# Altium PCB GH3020MB-V1.1 7.PcbDoc
Units mil, origin at the board's own origin, x right, y up, seen from the top; angles counter-clockwise.
Board outline 559.06 x 830.44 mil, 4 copper layers (Top, Inner Layer 2, Inner Layer 3, Bottom), stack 5.6 mil thick; 38 components, 35 nets, 143 pads, 139 vias.
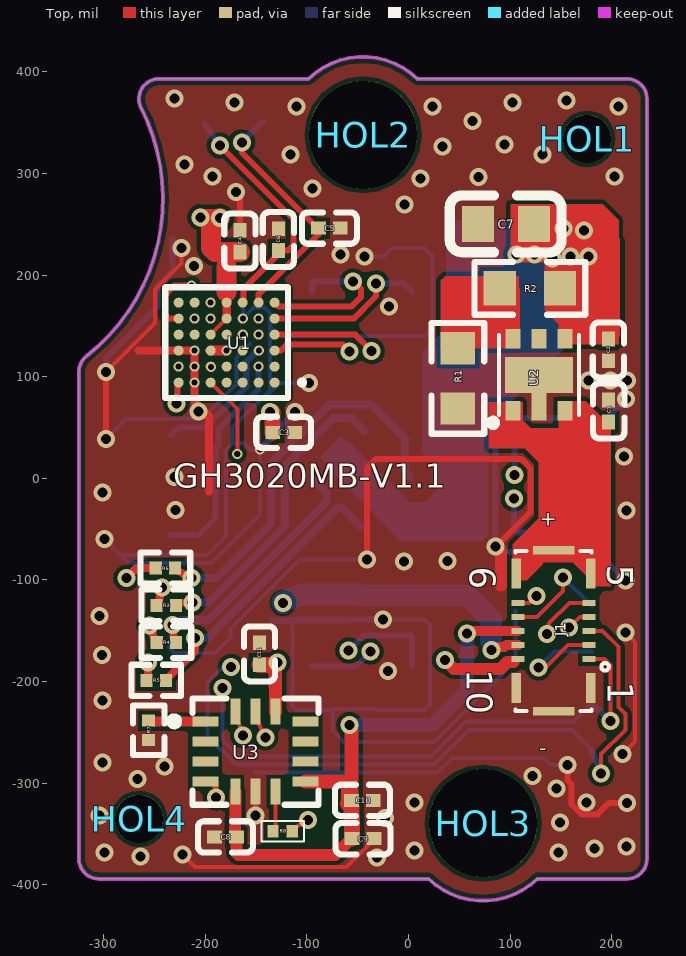
[diagram p0: Top view]
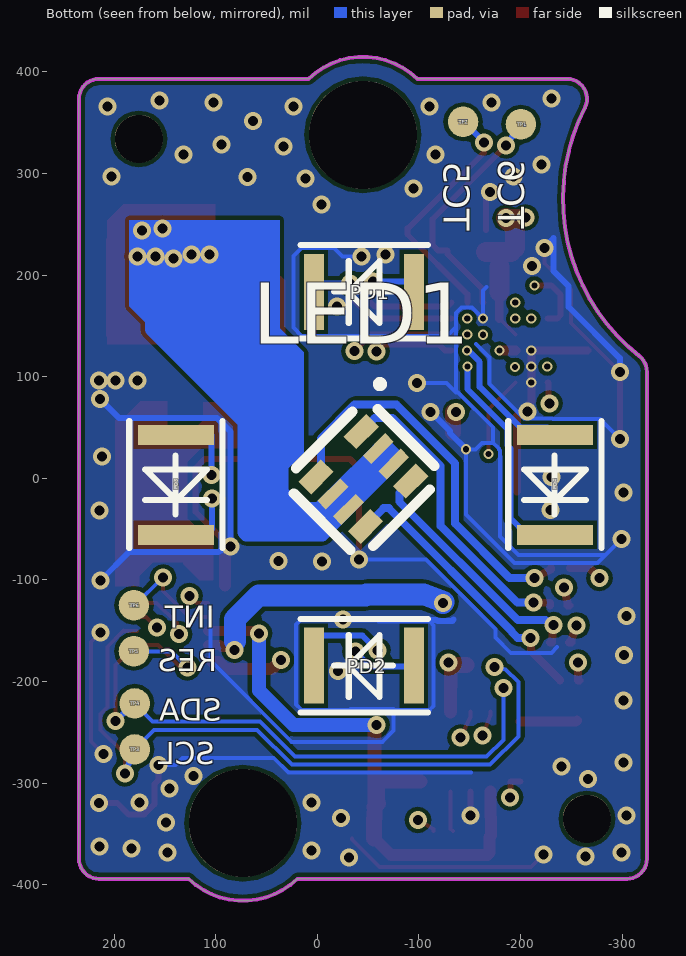
[diagram p1: Bottom view, seen from below]
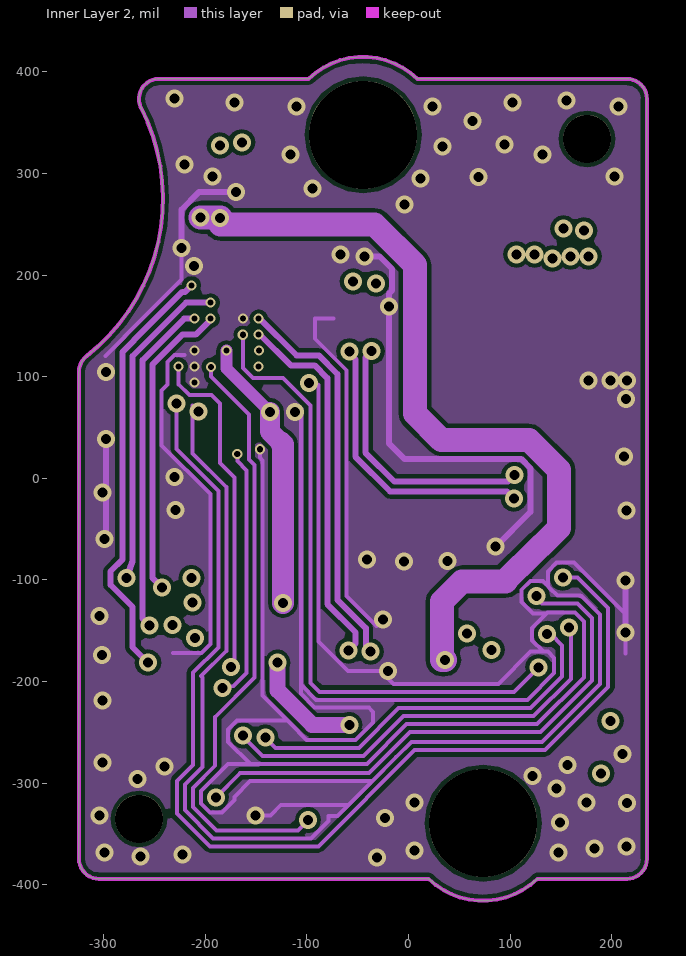
[diagram p2: Inner Layer 2]
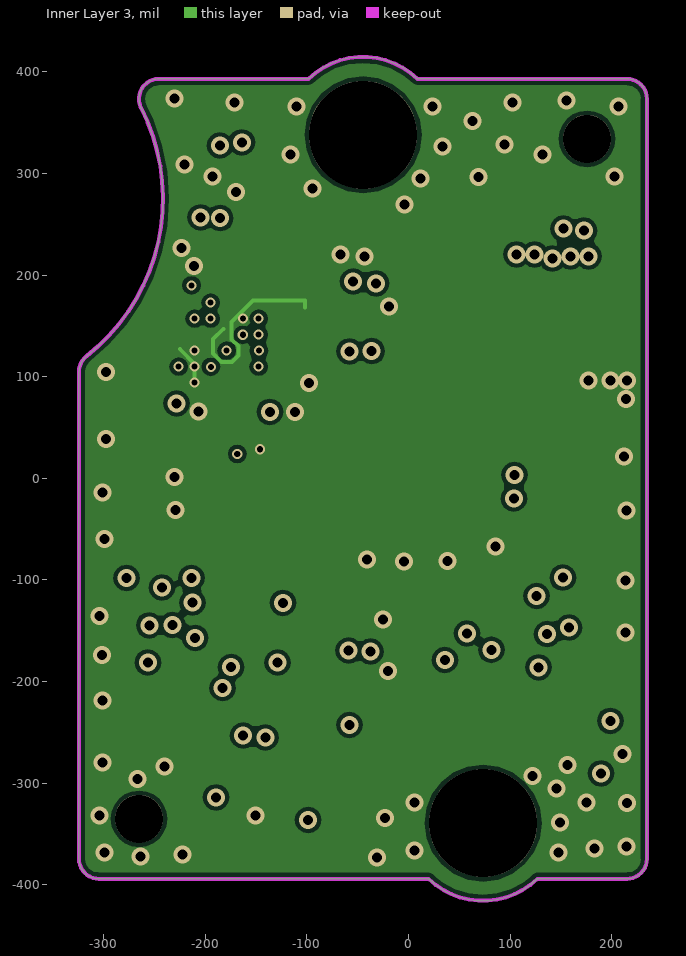
[diagram p3: Inner Layer 3]

## Layer stack, top to bottom
Solder Mask Top: solder mask 0.4, Solder Resist, Dk 3.5
Top: signal copper 1.4
Inner Layer 2: signal copper 1.4
Inner Layer 3: signal copper 1.4
Bottom: signal copper 1.4
Solder Mask Bottom: solder mask 0.4, Solder Resist, Dk 3.5

## Board outline
-324.39,104.84 -324.39,-374.56 ccw(c-304.7,-374.56) -304.7,-394.25 19.82,-394.26 ccw(c73.25,-339.13) 126.68,-394.26 214.98,-394.25 ccw(c214.98,-374.56) 234.67,-374.56 234.67,373.47 ccw(c214.98,373.47) 214.98,393.15 8.57,393.17 ccw(c-44.86,338.04) -98.29,393.17 -245.69,393.15 ccw(c-245.69,373.47) -263.23,364.53 -263.17,364.41 cw(c-438.56,275.04) -317.1,120.13 -316.88,120.31 ccw(c-304.7,104.84)

## Design rules (kind name [scope] priority, off if disabled: settings)
Clearance "Clearance - Default - DEFAULT- SMD" [IsVia vs IsSMTPin] p1: gap=0 ignorepadtopadclearanceinfootprint=FALSE
Clearance "Clearance - Default - DEFAULT - Via" [IsVia vs IsVia] p2: gap=0 ignorepadtopadclearanceinfootprint=FALSE
Clearance "Clearance - Default - DEFAULT - Net" [All] p3: gap=3.94 ignorepadtopadclearanceinfootprint=FALSE except(0: Arc-Hole Track-Hole SMDPad-Hole THPad-Hole Via-Hole Fill-Hole Poly-Hole Region-Hole Text-Hole; 10: Text-Text)
ComponentClearance "ComponentClearance - Default - DEFAULT" [All] p1: gap=0 collisioncheckmode=3 verticalgap=10 showdistances=FALSE
FanoutControl Fanout_Small [(CompPinCount < 5)] p3: bgadir=Out bgaviamode=Centered fanoutstyle=Auto fanoutdirection=OutThenIn viagrid=1 // Fanout_Small (Default Rule)
FanoutControl Fanout_SOIC [IsSOIC] p4: bgadir=Out bgaviamode=Centered fanoutstyle=Auto fanoutdirection=Alternating viagrid=1 // Fanout_SOIC (Default Rule)
HoleToHoleClearance "HoleToHoleClearance - Default - DEFAULT" [All] p1: gap=0 allowstackedmicrovias=TRUE
Length "Default Length" [All] p1: maxlimit=50000 minlimit=0
MaxMinImpedance "Default Impedance" [All] p1: minimum=50.00 maximum=150.0
ParallelSegment "Default Parallel Segment Same Layer" [All] p1: limit=1000 gap=200
ParallelSegment "Default Parallel Segment Adjasent" [All] p2: limit=1000 gap=200
PlaneConnect "Default PlaneConnect" [All] p1: planeconnectstyle=Direct reliefexpansion=20 reliefentries=4 reliefconductorwidth=3.94 reliefairgap=10
PolygonConnect "PolygonConnect - Default SMT" [IsSMTPin] p1: connectstyle=Direct reliefconductorwidth=3.94 reliefentries=4 polygonreliefangle="45 Angle" airgapwidth=10
PolygonConnect "PolygonConnect - Default Pad" [All] p2: connectstyle=Direct reliefconductorwidth=3.94 reliefentries=4 polygonreliefangle="45 Angle" airgapwidth=10
RoomDefinition "Room: DRW96205950" [All vs False] p1: confinementstyle=ConfineOut formatcopy=TRUE lockcomponents=FALSE outline -118.4,78.83 -239.48,78.83 -239.48,187.74 -118.4,187.74 -118.4,78.83
RoomDefinition "Room: DRW52040410" [All vs False] p2: confinementstyle=ConfineOut formatcopy=TRUE lockcomponents=FALSE outline -263.22,364.54 ccw(c-263.22,364.52) -263.22,364.5 ccw(c-263.22,364.52) -263.22,364.54
RoomDefinition "Room: DRW43974602" [All vs False] p3: confinementstyle=ConfineOut formatcopy=TRUE lockcomponents=FALSE outline -316.87,120.35 ccw(c-316.87,120.31) -316.87,120.27 ccw(c-316.87,120.31) -316.87,120.35
RoutingLayers "RoutingLayers - Default - DEFAULT" [All] p1: top layer_v5=TRUE mid layer 1_v5=TRUE mid layer 2_v5=TRUE bottom layer_v5=TRUE
RoutingPriority "RoutingPriority - Default - DEFAULT" [All] p1: routingpriority=0
RoutingTopology "Default Routing Topology" [All] p1: topology=Shortest
RoutingVias "RoutingVias - Default - DEFAULT" [All] p1: holewidth=37 width=55 viastyle="Through Hole" minholewidth=37 minwidth=55 maxholewidth=37 maxwidth=55
SMDToCorner "SMDToCorner - Default - DEFAULT" [All] p1: distance=0
SolderMaskExpansion [All] p1: expansion=4 istentingtop=FALSE
Width "Default Width" [All] p1: maxlimit=118.11 minlimit=3.94 preferedwidth=3.94
22 further rules are at their usual default settings.

## Classes and differential pairs
component class GH3020_PD_Board: C1 C2 C3 C4 C5 C6 C7 C8 C9 C10 C11 J1 LED1 PD1 PD2 PD3 PD4 R1 R2 R3 R4 R5 R6 R7 R8 TP1 TP2 TP3 TP4 TP5 TP6 U1 U2 U3

## Components (designator, comment, footprint, x,y, rotation, side; value= is the part's Value field where it differs from the comment)
C1 "C0201" C0201 197,66.29 r90 top
C2 "C0201" C0201 196.64,126.4 r270 top
C3 "C0201" C0201 -122.87,45.14 r0 top
C4 "C0201" C0201 -165.98,233.43 r90 top
C5 "C0201" C0201 -77.94,246.22 r0 top
C6 "C0201" C0201 -128.15,234.9 r90 top
C7 "C0603" C0603 95.82,250.23 r0 top
C8 "C0201" C0201 -180.24,-352.95 r180 top
C9 "C0201" C0201 -44.8,-354.74 r180 top
C10 "C0201" C0201 -45.44,-316.99 r0 top
C11 "C0201" C0201 -146.76,-172.8 r90 top
HOL1 "DH2_7MMNA" DH2_7MMNA 175.67,334.04 r0 top
HOL2 "DH2_7MMN" DH2_7MMN -44.82,338.04 r0 top
HOL3 "DH2_7MMN" DH2_7MMN 73.39,-339.32 r0 top
HOL4 "DH2_7MMNA" DH2_7MMNA -265.28,-335.17 r0 top
J1 "CONN-SMD_BK13C06-10DS-2-0.35V-800" CONN-SMD_BK13C06-10DS-2-0.35V-800 103.14,-230.64 r0 top
LED1 "SFH 7017" SFH7017 0,0 r135 bottom
PD1 "SFH2703" SFH2703 3.39,183.51 r180 bottom
PD2 "SFH2703" SFH2703 3.39,-184.51 r180 bottom
PD3 "SFH2703" SFH2703 139.22,-55.67 r90 bottom
PD4 "SFH2703" SFH2703 -233.81,-55.67 r90 bottom
R1 "0603R" 0603R 48.54,98.38 r270 top
R2 "0603R" 0603R 119.43,186.94 r180 top
R3 "RES0201" RES0201 -266.01,-108.4 r0 top
R4 "RES0201" RES0201 -265.84,-144.78 r0 top
R5 "RES0201" RES0201 -220.92,-215.5 r180 top
R6 "RES0201" RES0201 -211.84,-104.96 r180 top
R7 "RES0201" RES0201 -272.38,-275.5 r90 top
R8 "0201C-M" 0201C-M -123.9,-347.34 r0 top
TP1 "TESTPOINT" TESTPOINT -200.31,348.48 r180 bottom
TP2 "TESTPOINT" TESTPOINT -143.41,350.83 r180 bottom
TP3 "TESTPOINT" TESTPOINT 179.83,-266.9 r270 bottom
TP4 "TESTPOINT" TESTPOINT 179.83,-221.63 r270 bottom
TP5 "TESTPOINT" TESTPOINT 180.6,-170.31 r90 bottom
TP6 "TESTPOINT" TESTPOINT 180.6,-125.04 r90 bottom
U1 "WLCSP42" WLCSP42 -178.81,133.36 r180 top
U2 "U-DFN2020-6_L2.0-W2.0-P0.65-BL-EP" U-DFN2020-6_L2.0-W2.0-P0.65-BL-EP 128.39,101.81 r0 top
U3 "LGA-14_L3.0-W2.5-P0.50-TL_QMI8658A" LGA-14_L3.0-W2.5-P0.50-TL_QMI8658A -214.65,-214.36 r0 top

## Footprints (in the part's own frame and the unit in brackets; to place one, negate y for a bottom-side part, rotate by r counter-clockwise, add the part's x,y. Pads: shape width x height; smd on the part's side, far side on the other; paste and mask are expansions set on the pad)
0201C-M [mil]
  rect 11.02x12 smd: 1(-9.39,0) 2(9.39,0)
  silkscreen extent -21,-10 21,10
0603R [mil]
  rect 31.75x34.02 smd: 1(-29.65,0) 2(29.65,0)
  silkscreen extent -55,-26 55,26
C0201 [mil]
  rect 14.51x12.76 smd paste-6.75 mask+2: 1(-10.8,0) 2(10.8,0)
  silkscreen extent -27,-15 27,15
C0603 [mm]
  rect 0.8x0.9 smd: 1(-0.7,0) 2(0.7,0)
  silkscreen extent -1.41,-0.71 1.39,0.72
CONN-SMD_BK13C06-10DS-2-0.35V-800 [mm]
  rect 0.325x0.15 smd mask+0.051: 1(1.89,1.344) 2(1.89,1.694) 3(1.89,2.044) 4(1.89,2.394) 5(1.89,2.744) 6(0.116,2.744) 7(0.116,2.394) 8(0.116,2.044) 9(0.116,1.694) 10(0.116,1.344)
  rect 0.24x0.75 smd mask+0.051: 11(0.074,0.609) 12(1.933,0.609) 13(1.933,3.479) 14(0.074,3.479)
  rect 1.04x0.215 smd mask+0.051: 15(1.007,0.029) 16(1.007,4.059)
  silkscreen extent 0.05,0.04 2.39,4.04
DH2_7MMN [mm]
  round 2.7 hole 2.7 unplated: 1(0,0)
DH2_7MMNA [mm]
  round 1.2 hole 1.2 unplated: 1(0,0)
LGA-14_L3.0-W2.5-P0.50-TL_QMI8658A [mm]
  rect 0.65x0.25 smd mask+0.051: 1(0.374,-0.642) 2(0.374,-1.142) 3(0.374,-1.642) 4(0.374,-2.142) 8(2.874,-2.142) 9(2.874,-1.642) 10(2.874,-1.142) 11(2.874,-0.642)
  rect 0.25x0.65 smd mask+0.051: 5(1.124,-2.392) 6(1.624,-2.392) 7(2.124,-2.392) 12(2.124,-0.392) 13(1.624,-0.392) 14(1.124,-0.392)
  silkscreen extent -0.51,-2.72 3.2,-0.07
RES0201 [mil]
  rect 11.93x12.76 smd paste-5.88 mask+2: 1(17.97,-16.62) 2(36.99,-16.62)
  silkscreen extent 3,-32 52,-1
SFH2703 [mm]
  rect 0.5x1.9 smd mask+0.051: 1(2.5,0) 2(0,0)
  silkscreen extent -0.33,-1.17 2.84,1.17
SFH7017 [mm]
  rect 0.8x0.45 smd paste+0 mask+0.051: 1(1.6,0.05) 4(1.6,-1.7) 5(0,0.05) 8(0,-1.7)
  rect 0.8x0.3 smd paste+0 mask+0.051: 2(1.6,-0.55) 3(1.6,-1.1) 6(0,-0.55) 7(0,-1.1)
  silkscreen extent -0.69,-2.18 2.82,0.61, body extent -0.25,-1.88 1.85,0.25, height 0.61
TESTPOINT [mil]
  round 30 smd: 1(0,0)
U-DFN2020-6_L2.0-W2.0-P0.65-BL-EP [mm]
  rect 0.37x0.48 smd paste-0.227 mask+0.051: 1(-0.65,-0.9) 3(0.65,-0.9) 4(0.65,0.9) 5(0,0.9) 6(-0.649,0.9)
  rect 0.37x0.8 smd paste-0.387 mask+0.051: 2(0,-0.74)
  rect 1.7x0.9 smd paste-0.837 mask+0.051: 7(0,0.001)
  silkscreen extent -1.24,-1.29 1,1
WLCSP42 [mm]
  round 0.25 smd paste-0.112 mask+0.022: A1(-1.194,0.995) A2(-0.794,0.995) A3(-0.394,0.995) A4(0.006,0.995) A5(0.406,0.995) A6(0.806,0.995) A7(1.206,0.995) B1(-1.194,0.595) B2(-0.794,0.595) B3(-0.394,0.595) B4(0.006,0.595) B5(0.406,0.595) B6(0.806,0.595) B7(1.206,0.595) C1(-1.194,0.195) C2(-0.794,0.195) C3(-0.394,0.195) C4(0.006,0.195) C5(0.406,0.195) C6(0.806,0.195) C7(1.206,0.195) D1(-1.194,-0.205) D2(-0.794,-0.205) D3(-0.394,-0.205) D4(0.006,-0.205) D5(0.406,-0.205) D6(0.806,-0.205) D7(1.206,-0.205) E1(-1.194,-0.605) E2(-0.794,-0.605) E3(-0.394,-0.605) E4(0.006,-0.605) E5(0.406,-0.605) E6(0.806,-0.605) E7(1.206,-0.605) F1(-1.194,-1.005) F2(-0.794,-1.005) F3(-0.394,-1.005) F4(0.006,-1.005) F5(0.406,-1.005) F6(0.806,-1.005) F7(1.206,-1.005)
  silkscreen extent -1.93,-1.39 1.54,1.38

## Part data
C1 C2 C3 C4 C5 C6: library part 1uF, "GRM033R61A105ME44D / 精度: ±20% / 额定电压: 10V / 材质(温度系数): X5R"
C7: "HGC0603R5106M250NTHJ / 品牌: Chinocera(华瓷) / 封装: 0603 / 容值: 10uF / 精度: ±20% / 额定电压: 25V / 材质(温度系数): X5R"
C8: library part 1uF, "0201B103K250NT / 精度: ±10% / 额定电压: 25V / 材质(温度系数): X7R"
C9 C11: library part 1uF, "CL03A104KO3NNNC / 精度: ±10% / 额定电压: 16V / 材质(温度系数): X5R"
C10: library part 1uF, "GRM033R61A225KE47D / 精度: ±10% / 额定电压: 10V / 材质(温度系数): X5R"
J1: library part 10pin_ds_BK13C06-10DS/2-0.35V(800)
PD1 PD2 PD3 PD4: library part SFH2073
R1: library part 200kΩ, "SCR0603F40K / 精度: ±1% / 功率: 100mW"
R2: library part 200kΩ, "0603WAF2103T5E / 精度: ±1% / 功率: 100mW"
R3 R4 R5 R6: "0201WMF0000TEE / 精度: ±1% / 功率: 50mW"
R7: "0201WMF1002TEE / 精度: ±1% / 功率: 50mW"
R8: library part 0Ω, "0201WMF0000TEE / 精度: ±1% / 功率: 50mW"
TP1 TP2 TP3 TP4 TP5 TP6: library part TP
U1: library part GH3020
U2: library part AP7335-18SNG-7, "AP7335-SNG-7 / 品牌: DIODES(美台) / 封装: DFN2020-6 / 输出类型: 可调 / 最大输入电压: 6V / 输出电压: 800mV~5V / 输出电流: 300mA"
U3: library part ICM-42670-P

## Via types
v1: diameter 17.72, hole 9.84, Top to Bottom, 121 vias
v2: diameter 10, hole 6, Top to Bottom, 18 vias

## Nets (pads, with @x,y where several pads share a name; then routed paths per layer and width w, separated by ;. In a path a pad name is that pad's centre, name@x,y a point inside that pad or via, vN(x,y) a via of type N, cw(c..) or ccw(c..) an arc to the next point about the centre after c; other vN are vias at no path point)
GH3020_INT: J1.7 TP6.1 U1.A7 | length 1205.7
  Top w3.94: J1.7 126.36,-136.37 151.82,-110.92 v1(151.82,-97.81)
  Top w5.91: v1(-228.32,73.69) -227.3,73.69 -227.3,94.16 U1.A7
  Inner Layer 2 w3.94: v1(-228.32,73.69) -228.32,28.74 -187.26,-12.32 -187.26,-166.45 -212.16,-191.35 -212.16,-281.98 -227.91,-297.73 -227.91,-329.9 -195.6,-362.21 -88.62,-362.21 5.95,-267.64 134.35,-267.64 196.33,-205.66 196.33,-127.7 166.44,-97.81 v1(151.82,-97.81)
  Bottom w3.94: v1(151.82,-97.81) 152.21,-97.42 180.21,-125.43 TP6.1
GH3020_RES: J1.2 TP5.1 U1.D3 | length 743.7
  Top w3.94: v1(127.99,-186.08) 134.76,-186.08 156.91,-163.93 J1.2
  Inner Layer 2 w3.94: v2(-163.13,141.26) -163.13,108.68 -153.13,98.68 -123.67,98.68 -96.67,71.68 -96.67,-201.33 -87.71,-210.29 103.78,-210.29 v1(127.99,-186.08)
  Bottom w3.94: v1(127.99,-186.08) 143.76,-170.31 TP5.1
GND: C1.2 C2.2 C3.2 C4.2 C5.2 C6.2 C7.1 C8.2 C9.1 C10.2 C11.2 J1.11 J1.12 J1.15 R1.2 R7.1 U1.A6 U1.B6 U1.C6 U1.C7 U1.E3 U2.2 U2.7 U3.6 | length 10105.5
  Top w3.94: v1(-297.75,104.49) -249.42,152.82 -249.42,185.74 -223.52,211.64 v1(-223.52,226.56) ; v1(-222.44,-370.08) -210.08,-382.44 -61.3,-382.44 -34.24,-355.38 -34.01,-355.38 C9.1 ; v1(210.68,-271.37) 222.85,-259.2 222.85,-161.27 v1(213.5,-151.92)
  Top w5.91: v1(-297.75,38.83) v1(-297.75,104.49) ; v1(-169.83,281.67) -165.98,277.82 C4.2 ; v1(-150.64,-331.68) U3.6 ; v1(-40.96,-79.84) -40.96,10.01 -31.89,19.08 110.76,19.08 119.99,9.85 119.99,-33.04 v1(85.73,-67.3) v1@90.83,-73.21 ; v1(156.46,-282.19) 156.46,-297.16 160.43,-301.13 160.43,-320.83 170.31,-330.71 185.98,-330.71 197.19,-319.5 v1(214.9,-319.5)
  Top w7.87: -265.83,125.66 U1.C7 v2(-210.52,125.66) v2(-210.52,109.91) v2(-210.52,94.16) -210.52,75.37 v1@-205.97,70.82 ; v1(-206.84,65.82) -206.84,69.95 v1@-205.97,70.82 ; -196.41,-13.19 -196.41,61.26 v1@-205.97,70.82
  Top w11.81: 90.83,-105.35 v1@90.83,-73.21
  Inner Layer 2 w3.94: -298.05,120.46 -279.53,138.98 -279.53,139.56 -223.52,195.57 v1(-223.52,226.56) ; -232.02,-171.85 -203.85,-171.85 -195.14,-163.14 -195.14,-15.64 -243.08,32.3 -243.08,86.27 -237.18,92.18 -237.18,114.43 -230.21,121.39 -220.63,121.39 ; v1(-206.84,65.82) -212.57,71.64 -212.57,24.39 -179.36,-8.82 -179.36,-169.76 -204.28,-194.68 -203.03,-195.93 -203.03,-284.36 -220.03,-301.36 -220.03,-326.64 -192.34,-354.33 -95.98,-354.33 -78.88,-337.23 -78.88,-332.24 -69.79,-332.24 -58.98,-321.43 ; v1(-150.64,-331.68) v1(-150.64,-331.68) -136.11,-331.76 -125.78,-321.43 -58.98,-321.43 ; v2(-146.33,28.55) -146.33,20.24 -143.71,17.62 -143.71,-214 -119.25,-238.47 ; v1(-111.52,65.47) -106.08,60.03 -106.08,-199.93 -106.08,-203.06 ; v1(-97.88,93.88) -91.05,93.88 -88.77,91.6 -88.77,-160.62 -59.52,-189.87 v1(-20.21,-189.87) -20.21,-197.07 -14.87,-202.41 88.47,-202.41 120.22,-170.66 132.68,-170.66 ; -74.1,157.32 -92.32,157.32 -92.32,137.47 -61.18,106.33 -61.18,-115.9 -31.6,-145.49 v1(-24.98,-138.87) ; v1@206.61,-271.37 v1(210.68,-271.37) ; 213.5,-172.23 v1(213.5,-151.92) ; 213.5,-133.73 162.81,-83.04 145.71,-83.04 137.06,-91.69 137.06,-105.98 ; -155.71,-281.13 -40.98,-281.13 -1.91,-242.06 126.52,-242.06 172.7,-195.88 172.7,-140.82 164.05,-132.17 136.76,-132.17 135.7,-133.23 ; -155.71,-281.13 -177.53,-281.13 -204.28,-307.88 -204.28,-320.12 -195.63,-328.77 -183.41,-328.77 -171.52,-316.88 -171.52,-313.53 -156.01,-298.02 -35.57,-298.02 ; -155.71,-281.13 -177.48,-259.36 -177.48,-247.12 -168.83,-238.47 -119.25,-238.47 ; -119.25,-238.47 -116.24,-241.48 -100.23,-257.49 -52.12,-257.49 -35.01,-240.38 -35.01,-229.81 -39.17,-225.65 -92.43,-225.65 -106.08,-212 -106.08,-203.06 ; -106.08,-203.06 -90.97,-218.17 116.86,-218.17 143.37,-191.66 143.37,-176.83 137.2,-170.66 132.68,-170.66 ; -58.98,-321.43 -54.22,-316.67 -35.57,-298.02 ; -35.57,-298.02 -12.11,-274.56 2.89,-259.56 131.29,-259.56 188.45,-202.4 188.45,-134.3 170.22,-116.07 169.34,-116.07 168.76,-115.49 146.57,-115.49 139.36,-108.28 137.06,-105.98 ; 132.68,-170.66 121.61,-159.59 121.61,-147.32 135.7,-133.23 ; 135.7,-133.23 122.55,-133.23 111.27,-121.95 111.27,-109.71 119.92,-101.06 132.14,-101.06 137.06,-105.98
  Inner Layer 2 w5.91: v1(-299.3,-59.71) -297.75,-58.16 v1(-297.75,38.83) ; v1(-223.52,226.56) -223.52,264.47 -206.32,281.67 v1(-169.83,281.67) ; v1(-43.31,218.5) -28.56,218.5 -16.25,206.2 -16.25,184.63 -19.37,181.51 v1(-19.37,168.91) -19.37,34.39 -4.06,19.08 110.76,19.08 119.99,9.85 119.99,-33.04 v1(85.73,-67.3) ; v1(213.5,-151.92) 213.5,-133.73 v1(213.5,-100.63)
  Inner Layer 3 w3.94: -225.19,127.36 -210.52,112.7 v2(-210.52,109.91) v2(-210.52,94.16) ; -182.22,147.17 -192.34,137.05 -192.34,122.87 -184.02,114.55 -173.82,114.55 -167.42,120.94 -167.42,130.05 -174.04,136.67 -174.04,153.86 -153.03,174.87 -101.92,174.87 -101.92,167.89
  Bottom w3.94: v1(-299.3,-59.71) -283.73,-75.28 ; v1(-297.75,38.83) -278.07,58.51 -231.88,58.51 -231.47,58.92 v1@-203.24,58.92 ; -235.87,-166.27 -230.29,-171.85 -190.31,-171.85 -175.19,-156.72 -175.19,-148.21 -106.82,-79.84 v1(-40.96,-79.84) ; v1(-206.84,65.82) v1@-203.24,58.92 ; -166.28,188.21 -163.09,185.02 v2(-163.09,157.34) -152.36,168.07 -141.98,168.07 -136.4,162.49 -136.4,148.85 ; -156.07,132.16 -169.35,118.88 -169.35,92.81 v1@-203.24,58.92 ; -151.08,-289.72 28.56,-289.72 43.21,-275.07 132.66,-275.07 139.78,-282.19 v1(156.46,-282.19) ; -110.59,-139.2 -110.59,-141.2 ; v1(-97.88,93.88) -127.17,93.88 -136.4,84.64 ; -60.1,-139.2 -60.1,-141.2 -110.59,-141.2 ; v1(-43.31,218.5) -24.85,218.5 -16.53,226.82 15.67,226.82 23.69,218.8 23.69,148.21 15.68,140.2 -127.75,140.2 -136.4,148.85 ; v1(-24.98,-138.87) 15.9,-138.87 21.01,-143.98 21.01,-222.49 15.67,-227.83 -31.51,-227.83 -32.37,-226.97 -74.96,-226.97 ; 105.34,-130.24 105.34,-179.43 25.44,-259.33 -63.89,-259.33 -74.96,-248.26 -74.96,-226.97 ; -283.73,-75.28 -197.83,-75.28 -179.69,-57.14 -179.69,27.2 -178.67,28.22 -178.67,29.24 -173.07,34.84 ; -283.73,-75.28 -275.78,-83.23 -193.97,-83.23 -146.33,-35.59 v2(-146.33,28.55) -155.53,28.55 -161.82,34.84 -173.07,34.84 ; -173.07,34.84 -173.07,49.87 -138.29,84.64 -136.4,84.64 ; -136.4,84.64 -136.4,148.85 ; -110.59,-141.2 -114.06,-144.67 -114.06,-224.36 -110.59,-227.83 -75.82,-227.83 -74.96,-226.97
  Bottom w5.91: v1(-297.75,104.49) -297.75,118.17 -247.29,168.63 -247.29,189.08 -232.52,203.84 -232.52,236.32 -223.52,227.31 v1(-223.52,226.56) ; v2(-146.33,28.55) -130.29,44.59 -130.29,46.7 v1(-111.52,65.47) ; -133.93,-139.2 -132.8,-140.33 -118.1,-140.33 -117.09,-139.32 -110.71,-139.32 -110.59,-139.2 -60.1,-139.2 v1(-24.98,-138.87) ; v1(85.73,-67.3) 97.33,-72.4 185.27,-72.4 v1(213.5,-100.63) ; v1(85.73,-67.3) 85.76,-55.49 85.75,46.28 98.97,59.5 195.34,59.5 v1(213.81,77.97)
  other v1: -31.09,-373.47 -263.64,-372.38 -299.21,-368.11 147.64,-368.11 5.91,-366.14 183.07,-364.17 214.57,-362.2 149.08,-338.83 -23.05,-334.55 -303.99,-331.91 5.91,-318.9 175.2,-318.9 145.67,-305.12 -266.55,-295.84 122.15,-293.12 -240.16,-283.46 -301.18,-279.53 -301.18,-218.5 -301.69,-173.95 -304.18,-135.51 -4.51,-81.92 38.33,-81.59 -229.2,-31.28 214.57,-31.5 -301.18,-13.78 -230.2,1.06 211.82,21.65 177.17,96.46 198.82,96.46 215.09,96.1 -211.26,208.71 -66.93,220.47 -3.94,269.69 -94.49,285.43 11.81,295.28 68.97,296.61 -192.91,297.24 202.76,297.24 -220.47,309.06 -116.14,318.9 131.89,318.9 33.46,326.77 94.49,328.74 63.15,351.73 -110.24,366.14 23.62,366.14 206.69,366.14 -171.26,370.08 102.36,370.08 155.51,372.05 -230.31,374.02
GREEN1_LED: R3.1 U1.E5 | length 320.9
  Top w7.87: R3.1 -246.01,-125.02 -246.01,-122.58 v1(-242.7,-107.52)
  Inner Layer 2 w3.94: v2(-194.77,157.16) v2@-194.4,157.55
  Inner Layer 2 w5.91: v1(-242.7,-107.52) -251.94,-98.28 -251.94,112.19 -222.73,141.4 -209.46,141.4 -194.24,156.62 v2(-194.77,157.16) ; v2@-194.45,157.6 v2@-194.4,157.55
GREEN2_LED: R5.2 U1.E7 | length 504.2
  Top w5.91: U1.E7 -235.91,157.16 -239.5,160.75 -239.5,180.7 -230.35,189.84 v2(-213.61,189.84)
  Top w7.87: R5.2 -256.58,-198.87 v1(-256.58,-181.34)
  Inner Layer 2 w5.91: v1(-256.58,-181.34) -271.71,-166.21 -271.71,-126.56 -293.31,-104.96 -293.31,-91.63 -281.48,-79.8 -281.48,124.41 -270.45,135.44 -270.45,135.72 -222.68,183.49 -219.96,183.49 v2(-213.61,189.84)
I2C1_SCL: J1.5 U3.13 | length 461.5
  Top w3.94: U3.13 -150.71,-234.27 v1(-140.98,-255.16) ; v1(136.37,-153.44) 138.38,-142.61 158.4,-122.59 J1.5
  Inner Layer 2 w3.94: v1(-140.98,-255.16) -130.77,-265.37 -48.87,-265.37 -9.8,-226.3 119.87,-226.3 151.24,-194.92 151.24,-164.47 140.21,-153.44 v1(136.37,-153.44)
I2C1_SDA: J1.4 U3.14 | length 463.4
  Top w3.94: U3.14 -170.39,-232.7 v1(-162.72,-253.24) ; v1(157.94,-146.94) 168.51,-136.37 J1.4
  Inner Layer 2 w3.94: v1(-162.72,-253.24) -163.25,-253.77 -143.78,-273.25 -44.24,-273.25 -5.17,-234.18 123.12,-234.18 159.72,-197.58 159.72,-148.72 v1(157.94,-146.94)
I2C3_SCL: J1.3 TP3.1 U1.B7 | length 1024.7
  Top w3.94: J1.3 190.42,-150.15 190.63,-149.95 206.5,-165.82 206.5,-224.99 213.43,-231.92 213.43,-247.59 189.48,-271.54 v1(189.48,-290.4)
  Inner Layer 2 w3.94: v2(-226.27,109.91) -226.27,92.54 -215.65,81.92 -193.91,81.92 -185.77,73.78 -185.77,14.83 -171.49,0.55 -171.49,-183.86 -173.45,-185.82 v1(-174.54,-185.82)
  Bottom w3.94: v1(-174.54,-185.82) -185.37,-188.05 -197.73,-200.41 -197.73,-254.07 -169.96,-281.84 25.2,-281.84 59.29,-247.75 160.67,-247.75 TP3.1
  Bottom w5.91: TP3.1 v1(189.48,-290.4)
I2C3_SDA: J1.1 TP4.1 U1.A5 | length 875.8
  Top w3.94: U1.A5 -168.56,67.95 v2(-168.56,23.93) ; J1.1 192.78,-177.71 198.63,-183.56 v1(198.63,-238.71)
  Inner Layer 2 w3.94: v1(-182.97,-206.53) -172.14,-204.3 -159.46,-191.62 -159.46,7.76 -168.56,16.86 v2(-168.56,23.93)
  Bottom w3.94: v1(-182.97,-206.53) -182.97,-257.64 -166.65,-273.96 21.95,-273.96 56.63,-239.28 162.18,-239.28 TP4.1
  Bottom w5.91: TP4.1 v1(198.63,-238.71)
ICM_INT1: J1.6 U3.4 | length 590.2
  Top w3.94: J1.6 118.69,-122.59 119.71,-122.15 v1(126.03,-115.83)
  Top w5.91: U3.4 -190.16,-298.68 v1(-189.52,-314)
  Inner Layer 2 w3.94: v1(-189.52,-314) -165.66,-290.14 -38.85,-290.14 1.35,-249.93 129.78,-249.94 180.58,-199.14 180.58,-137.56 166.38,-123.37 131.34,-123.37 126.03,-118.06 v1(126.03,-115.83)
IR_LED: R4.1 U1.E6 | length 351.6
  Top w7.87: v1(-255.21,-144.7) -249.9,-158.96 -249.9,-161.4 R4.1
  Inner Layer 2 w5.91: v1(-255.21,-144.7) -261.8,-138.11 -261.8,116.25 -220.89,157.16 v2(-210.52,157.16)
NETC5_1: C5.1 TP2.1 U1.F2 | length 242.7
  Top w5.91: v1(-164.09,330.7) -164.09,320.71 -89.61,246.22 C5.1 -88.73,239.96 -147.53,181.16 U1.F2
  Bottom w5.91: v1(-164.09,330.7) TP2.1
NETC6_1: C6.1 TP1.1 U1.F3 | length 236.9
  Top w5.91: v1(-185.69,327.52) -113.36,255.19 -113.36,229.56 -118.82,224.1 C6.1 -128.15,220.61 -162.29,186.47 -162.29,172.9 U1.F3
  Bottom w5.91: TP1.1 v1(-185.69,327.52)
NETLED1_1: LED1.1 R3.2 | length 303.8
  Top w7.87: R3.2 -229.02,-122.61 v1(-212.68,-122.37)
  Bottom w7.87: v1(-212.68,-122.37) -196.75,-122.37 -121.38,-47 -121.38,12.07 -74.03,59.42 -56.4,59.42 LED1.1
NETLED1_4: LED1.4 R4.2 | length 245.6
  Top w7.87: v1(-232.46,-144.55) -230.88,-158.96 -230.88,-161.4 R4.2
  Bottom w7.87: v1(-232.46,-144.55) -224.47,-139.62 -197.22,-139.62 -80.66,-23.06 -80.66,-14.49 -92.12,-3.02 LED1.4
NETLED1_5: LED1.5 R6.1 | length 388.8
  Top w7.87: R6.1 -229.81,-89.72 v1(-213.79,-98.11)
  Bottom w7.87: v1(-213.79,-98.11) -189.22,-98.11 -135.59,-44.48 -135.59,14.56 -77.63,72.52 -36.64,72.52 -3.48,39.36 -3.48,6.26 LED1.5
NETLED1_8: LED1.8 R5.1 | length 277
  Top w7.87: R5.1 -238.89,-198.46 -210.31,-169.88 v1(-209.96,-157.08)
  Bottom w7.87: v1(-209.96,-157.08) -197.16,-157.08 -191.1,-151.02 -191.1,-150.2 -70.32,-29.42 -65.23,-29.42 LED1.8
NETR1_1: R1.1 R2.2 U2.6 | length 307.8
  Top w3.94: R1.1 33.46,128.03 33.46,193.96 35.14,195.64 R2.2@94.96,195.64 ; R1.1 R1.1@51.44,137.25 ; R1.1 48.54,134.35 R1.1@51.44,137.25 ; R1.1@51.44,137.25 U2.6 107.12,137.25 107.96,138.09 107.96,186.59 R2.2 ; R2.2 R2.2@94.96,195.64 ; R2.2 89.77,190.45 R2.2@94.96,195.64
NETR7_2: R7.2 U3.1 | length 56.3
  Top w9.84: R7.2 -254.65,-239.62 U3.1
NETR8_1: R8.1 U3.7 | length 39.8
  Top w3.94: R8.1 -131.02,-345.07 U3.7
PD0_ANODE: PD1.1 U1.F1 | length 159.3
  Top w5.91: U1.F1 -127.73,168.85 -56.32,168.85 -46.68,178.49 -46.68,185.87 v1(-54.52,193.71)
  Bottom w5.91: PD1.1 -95.04,192.65 -93.98,193.71 v1(-54.52,193.71)
PD0_CATHODE: PD1.2 U1.E1 | length 160.5
  Top w5.91: U1.E1 -54.09,157.16 -32,179.25 v1(-32,191.94)
  Bottom w5.91: v1(-32,191.94) -5.04,191.94 PD1.2
PD1_ANODE: PD2.1 U1.E2 | length 451.3
  Inner Layer 2 w5.91: v2(-147.53,157.16) -146.99,157.69 -110.26,120.96 -88.34,120.96 -70.04,102.66 -70.04,-119.61 -42.1,-147.55 -42.1,-165.86 v1(-37.39,-170.57)
  Bottom w5.91: PD2.1 -94.32,-185.23 -52.05,-185.23 v1(-37.39,-170.57)
PD1_CATHODE: PD2.2 U1.D2 | length 466.1
  Inner Layer 2 w5.91: v2(-147.53,141.41) -146.89,142.05 -115.94,111.11 -92.41,111.12 -79.89,98.59 -79.89,-123.91 -51.98,-151.82 -51.98,-162.43 v1(-59.03,-169.48)
  Bottom w5.91: v1(-59.03,-169.48) -44.37,-154.82 2.5,-154.82 3.39,-155.71 PD2.2
PD2_ANODE: PD3.1 U1.D1 | length 440.6
  Top w5.91: U1.D1 -52.27,141.41 -36.12,125.25 v1(-36.29,125.08)
  Inner Layer 2 w5.91: v1(-36.29,125.08) -42.48,118.89 -42.48,25.3 -13.97,-3.21 97.7,-3.21 v1(104.24,3.33)
  Bottom w5.91: v1(104.24,3.33) 104.24,42.76 PD3.1
PD2_CATHODE: PD3.2 U1.C1 | length 457.2
  Top w5.91: U1.C1 -125.82,125.66 -120.01,131.47 -64.61,131.47 v1(-58.1,124.96)
  Inner Layer 2 w5.91: v1(-58.1,124.96) -52.32,116.77 -52.32,21.22 -18.04,-13.06 96.79,-13.06 v1(103.65,-19.92)
  Bottom w5.91: v1(103.65,-19.92) 103.65,-49.85 PD3.2@107.32,-53.52 ; PD3.2@107.32,-53.52 PD3.2 137.07,-53.52 PD3.2@107.32,-53.52
PD3_ANODE: PD4.1 U1.C2 | length 135.9
  Bottom w5.91: PD4.1 -226.51,50.06 -199.57,50.06 -159.72,89.91 -159.72,114.62 -147.99,126.34 v2(-147.31,125.66)
PD3_CATHODE: PD4.2 U1.B2 | length 217.4
  Bottom w5.91: PD4.2 -206.23,-55.67 -190.05,-39.49 -190.05,29.25 -186.98,32.32 -186.98,48.52 -147.6,87.9 v2(-147.6,109.91)
RED_LED: R6.2 U1.F5 | length 352.1
  Top w7.87: v1(-277.56,-98.15) -267.75,-88.34 R6.2
  Inner Layer 2 w5.91: v1@-278.24,-97.24 -277.56,-97.93 v1(-277.56,-98.15) -271.64,-81.65 -271.64,120.33 -219.06,172.9 v2(-194.77,172.9)
SW1_VDD1V8: C3.1 J1.9 U1.C4 U1.C5 | length 586.4
  Top w3.94: v2(-179.08,125.61) U1.C4 v2(-179.08,125.61)
  Top w9.84: U1.C5 U1.C4 ; v1(81.44,-168.77) 84.12,-166.09 94.24,-166.09 96.39,-163.93 J1.9
  Top w15.75: v1(-136.52,65.37) -133.67,65.37 C3.1
  Inner Layer 2 w11.81: v2(-179.08,125.61) -179.08,107.93 v1(-136.52,65.37)
  Inner Layer 2 w19.68: v1(-136.52,65.37) -136.52,45.98 -125.59,35.05
  Inner Layer 2 w21.65: -125.59,35.05 -123.7,33.16 v1(-123.7,-122.61)
  Bottom w3.94: v1@81.26,-160.18 81.44,-160.36 v1(81.44,-168.77)
  Bottom w21.65: v1(-123.7,-122.61) -124.08,-121.6 -104.38,-114.23 -48.54,-114.23 -47.53,-115.24 57.7,-115.24 81.26,-138.79 v1@81.26,-160.18
SW2_VDD1V9: C8.1 C9.2 C10.1 C11.1 J1.8 U3.5 U3.8 U3.12 | length 778.1
  Top w9.84: v1(57.46,-152.65) 59.96,-150.15 95.4,-150.15 J1.8
  Top w11.81: U3.5 -170.39,-333.47 -170.78,-333.86 -170.78,-351.62 C8.1 -169.45,-368.49 -167.31,-370.63 -72.36,-370.63 -56.47,-354.74 C9.2
  Top w12.99: v1@-131.19,-183.6 U3.12
  Top w13.78: U3.8 -59.56,-298.68 C10.1@-59.56,-320.13 ; v1(-58.23,-242.72) -56.24,-244.71 C10.1 -55.96,-316.99 -55.96,-323.73 -55.96,-329.17
  Top w15.75: C11.1 -131.19,-183.6 -128.99,-181.39 v1(-128.87,-181.39) ; C10.1@-59.56,-320.13 -55.96,-323.73 ; -55.96,-329.17 -55.96,-334.65 -55.6,-335.01 C9.2
  Inner Layer 2 w15.75: v1(-128.87,-181.39) -128.87,-208.7 -94.85,-242.72 v1(-58.23,-242.72)
  Bottom w13.78: v1(-58.23,-242.72) 23.72,-242.72 57.46,-208.98 v1(57.46,-152.65)
SYNC: R8.2 U1.B5 | length 623.4
  Top w3.94: U1.B5 v2(-194.51,109.61) ; R8.2 -114.5,-345.36 v1(-98.83,-336.3)
  Inner Layer 2 w3.94: v2(-194.51,109.61) -194.51,100.15 -157.24,62.88 -157.24,18.67 -151.59,13.02 -151.59,-196.08 -190.26,-234.75 -190.26,-282.73 -212.16,-304.62 -212.16,-323.38 -189.08,-346.45 -108.98,-346.45 v1(-98.83,-336.3)
VCC_3V3: C4.1 J1.10 U1.D5 U1.E4 U1.F4 | length 1107.3
  Top w3.94: U1.D5 U1.E4
  Top w5.91: -179.03,207.95 C4.1@-165.98,220.75 ; -179.03,208.13 -165.98,221.75 C4.1@-165.98,220.75 ; C4.1 C4.1@-165.98,220.75 ; 103.41,-180.86 J1.10 ; 103.41,-180.86 J1.10@106.56,-177.71 ; 103.41,-180.86 J1.10@104.16,-180.11 ; J1.10@104.16,-180.11 J1.10@106.56,-177.71 ; J1.10@104.16,-180.11 J1.10 ; J1.10@106.56,-177.71 J1.10
  Top w7.87: U1.F4 -179.03,183.45
  Top w8.66: U1.E4 U1.F4
  Top w11.81: v1(35.78,-178.91) 44.35,-187.48 90.49,-187.48 97.11,-180.86 103.41,-180.86
  Top w17.72: v1(-204.66,256.88) v1(-185.39,255.95)
  Top w17.94: C4.1@-165.98,221.75 C4.1
  Top w18.87: -179.31,208.24 -179.03,207.95
  Top w19.07: -179.31,208.24 -179.03,208.13
  Top w19.43: -179.03,207.95 -179.03,208.13
  Top w19.68: v1(-185.39,255.95) -194.57,246.77 -194.57,226.74 -190.46,222.63 C4.1 ; -179.03,183.45 -179.03,207.95
  Inner Layer 2 w17.72: v1(-185.39,255.95) v1@-185.2,249.82
  Inner Layer 2 w23.62: v1(-204.66,256.88) v1@-185.31,256.88 ; v1(-185.39,255.95) v1@-185.31,256.88 ; v1(35.78,-178.91) 32.85,-178.91 32.85,-121.36 52.44,-101.77 95.43,-101.77 95.43,-101.6 95.61,-101.42 95.61,-101.26 95.8,-101.07 95.8,-100.89 96.04,-100.65 96.04,-100.4 96.47,-99.97 96.47,-99.46 109.61,-86.32 109.85,-86.32 110.09,-86.32 130.24,-66.17 130.89,-66.17 148.05,-49.01 148.05,8.24 118.5,37.79 32.19,37.79 6.24,63.74 6.24,210.15 -33.43,249.82 -185.2,249.82 v1@-185.31,256.88
VDD_5V: C1.1 J1.13 J1.14 J1.16 U2.1 U2.3 | length 658.6
  Top w3.94: U2.1 102.81,64.22 119.65,47.37 ; J1.14 106.04,-71.39 132.9,-44.53 132.9,34.12 119.65,47.37 ; 119.65,47.37 142.09,47.37 142.3,47.16 153.97,47.16 ; J1.16 J1.16@153.97,-68.93 ; J1.16 147.44,-75.47 J1.16@153.97,-68.93 ; J1.16 J1.16@153.97,-70.82 ; J1.16@153.97,-70.82 J1.16@153.97,-68.93 ; J1.16@153.97,-70.82 159.03,-70.82 165.19,-76.98 172.59,-76.98 179.23,-83.62 J1.13 189.94,-93.66 197,-100.73 C1.1 192.19,55.5 181.31,66.38 U2.3 153.97,47.16 ; J1.16@153.97,-68.93 153.97,47.16
VDDA_5V: C2.1 C7.2 LED1.2 LED1.3 LED1.6 LED1.7 R2.1 U2.4 | length 1361.6
  Top w3.94: v1(141.46,216.12) v1@159.45,216.12 ; R2.1 149.08,166.33 153.97,161.44 U2.4 175.78,137.2 C2.1 ; v1(159.45,218.5) v1@159.45,216.12 ; v1@159.45,216.12 167.05,216.12 187.42,236.49 187.42,240.43 200.72,240.43 206.21,234.94 206.21,140.47 C2.1@201.3,135.56 ; C2.1 197.82,137.2 201.3,133.72 C2.1@201.3,135.56 ; C2.1 C2.1@201.3,135.56
  Top w5.91: C7.2 141.21,232.39 ; v1(141.46,216.12) 141.21,232.39 ; v1(152.46,245.66) 148.03,239.21 141.21,232.39
  Bottom w11.81: LED1.3 LED1.7 -4.92,-56.33 70.14,-56.33 72.96,-53.51 72.96,55.29 163.98,146.31 v1@163.98,218.5 ; LED1.2 LED1.6 5.77,-36.39 36.14,-36.39 48.75,-23.78 48.75,227.07 52.32,230.64 161.92,230.64 163.98,228.58 v1@163.98,218.5 ; v1(159.45,218.5) v1@163.98,218.5
  other v1: 177.17,218.5 106.3,220.47 124.02,220.47 172.62,243.77
pads on no net: HOL1.1 HOL2.1 HOL3.1 HOL4.1 U1.A1 U1.A2 U1.A3 U1.A4 U1.B1 U1.B3 U1.B4 U1.C3 U1.D4 U1.D6 U1.D7 U1.F6 U1.F7 U2.5 U3.2 U3.3 U3.9 U3.10 U3.11

## Polygon pours and split planes (outlines as drawn)
GND on Bottom "Bottom-GND" (solid, remove dead copper, pour order 0): 375.37,449.95 375.37,-482.91 -497.65,-482.91 -497.65,449.95
GND on Inner Layer 3 "Inner Layer 3-GND" (solid, remove dead copper, pour order 1): 449.66,489.16 449.66,-542.77 -543.06,-542.77 -543.06,489.16
GND on Inner Layer 2 "Inner Layer 2-GND" (solid, remove dead copper, pour order 2): 412.52,468.53 412.52,-513.87 -520.35,-513.87 -520.35,468.53
GND on Top "Top-GND" (solid, remove dead copper, pour order 3): 476.5,507.74 476.5,-565.47 -567.82,-565.47 -567.82,507.74

## Keep-outs
Top:
  region: -118.4,78.83 -239.48,78.83 -239.48,187.74 -118.4,187.74 -118.4,78.83
Keep-Out Layer:
  the board outline again, w3.94

## Other copper
Top:
  region net VDD_5V: 102.36,-100.39 116.14,-100.39 131.89,-84.65 131.89,-82.68 161.42,-82.68 175.2,-96.46 175.2,-106.3 198.82,-106.3 198.82,57.09 192.91,57.09 174.21,75.79 147.64,75.79 147.64,49.21 120.08,49.21 112.2,57.09 112.2,74.8 78.74,74.8 78.74,29.53 114.17,29.53 127.95,15.75 127.95,-39.37 102.36,-64.96 102.36,-100.39
  region net NETR1_1: 35.43,198.82 108.27,198.82 108.27,127.95 35.43,127.95 35.43,198.82
  region net VDDA_5V: 147.64,131.89 206.69,131.89 206.69,253.94 190.94,269.69 100.39,269.69 100.39,212.6 133.86,212.6 133.86,165.35 147.64,151.57 147.64,131.89
Bottom:
  region net VDDA_5V: 37.16,253.94 185.04,253.94 185.04,169.29 74.8,59.06 74.8,-59.06 -7.87,-59.06 -87.6,20.67 -66.93,41.34 -1.97,-23.62 15.75,-23.62 28.54,-10.83 28.54,9.84 13.29,25.1 13.29,124.02 37.16,147.88 37.16,253.94

## Silkscreen, mask and mechanical layers (free items; w line width, h text height)
Silkscreen Top:
  text "GH3020MB-V1.1" at -231.61,-9.23 h23.62
  text "+" at 129.37,-46.93 h14.76
  text "5" at 195.75,-85.07 h25.59 r270
  text "6" at 60.38,-87.02 h25.59 r270
  text "10" at 57.23,-187.74 h25.59 r270
  text "1" at 196.09,-200.28 h25.59 r270
  text "-" at 128.67,-272.59 h14.76
Silkscreen Bottom:
  text "TC6" at -177.94,245.7 h25.59 r90
  text "TC5" at -124.61,243.45 h25.59 r90
  text "INT" at 101.1,-147.09 h21.65
  text "RES" at 98.39,-190.13 h21.65
  text "SDA" at 94.36,-238.52 h21.65
  text "SCL" at 101.25,-281.33 h21.65
Solder Mask Top:
  region: 146.41,-335.75 ccw(c73.74,-335.75) 73.74,-263.08 ccw(c73.74,-335.75) 1.07,-335.75 ccw(c73.74,-335.75) 73.74,-408.42 ccw(c73.74,-335.75)
  region: 226.24,336.47 ccw(c175.18,336.47) 175.18,387.53 ccw(c175.18,336.47) 124.13,336.47 ccw(c175.18,336.47) 175.18,285.41 ccw(c175.18,336.47)
  region: 27.55,340.87 ccw(c-45.12,340.87) -45.12,413.54 ccw(c-45.12,340.87) -117.79,340.87 ccw(c-45.12,340.87) -45.12,268.2 ccw(c-45.12,340.87)
  region: -224.82,-334.21 ccw(c-266.43,-334.21) -266.43,-292.61 ccw(c-266.43,-334.21) -308.04,-334.21 ccw(c-266.43,-334.21) -266.43,-375.82 ccw(c-266.43,-334.21)
  region: -179.41,-19.19 29.06,-19.19 29.06,-107.85 -179.41,-107.85 -179.41,-19.19
Solder Mask Bottom:
  region: 229.3,329.91 ccw(c172.83,329.91) 172.83,386.37 ccw(c172.83,329.91) 116.37,329.91 ccw(c172.83,329.91) 172.83,273.44 ccw(c172.83,329.91)
  region: -211.48,-339.8 ccw(c-267.94,-339.8) -267.94,-283.34 ccw(c-267.94,-339.8) -324.4,-339.8 ccw(c-267.94,-339.8) -267.94,-396.27 ccw(c-267.94,-339.8)
  region: 20.2,335.85 ccw(c-47.57,335.85) -47.57,403.63 ccw(c-47.57,335.85) -115.35,335.85 ccw(c-47.57,335.85) -47.57,268.08 ccw(c-47.57,335.85)
  region: 139.61,-349.59 ccw(c71.84,-349.59) 71.84,-281.82 ccw(c71.84,-349.59) 4.06,-349.59 ccw(c71.84,-349.59) 71.84,-417.37 ccw(c71.84,-349.59)
Drill Drawing:
  lines w3.94: 7305.97,-2983.99 7337.47,-3015.49 7408.34,-2944.62 ; 7739.05,-2987.93 7770.54,-3019.42 7841.41,-2948.56
  lines w10: 3254.16,-4865.05 6054.16,-4865.05 6254.16,-4865.05 ; 3254.16,-4665.05 6054.16,-4665.05 ; 3254.16,-4465.05 6054.16,-4465.05 6254.16,-4465.05 ; 3254.16,-4265.05 6254.16,-4265.05 ; 3254.16,-4065.05 6254.16,-4065.05 ; 3254.16,-3865.05 6054.16,-3865.05 8304.16,-3865.05 ; 3254.16,-3665.05 6054.16,-3665.05 8304.16,-3665.05 ; 3254.16,-3465.05 6054.16,-3465.05 8304.16,-3465.05 ; 3254.16,-2665.05 6054.16,-2665.05 8304.16,-2665.05 ; 3254.16,-2465.05 6054.16,-2465.05 ; 3254.16,-2265.05 6054.16,-2265.05 8304.16,-2265.05 ; 3254.16,-2065.05 6054.16,-2065.05 8304.16,-2065.05 ; 4204.16,-3865.05 4204.16,-2065.05 ; 4204.16,-3265.05 6054.16,-3265.05 6254.16,-3265.05 ; 4204.16,-3065.05 6054.16,-3065.05 8304.16,-3065.05 ; 4204.16,-2865.05 6054.16,-2865.05 6254.16,-2865.05 ; 4354.16,-3465.05 4354.16,-2665.05 ; 4494.72,-2666.23 4494.72,-2468.2 ; 4654.16,-2265.05 4654.16,-2065.05 ; 4657.31,-2666.23 4657.31,-2465.84 ; 6004.16,-4665.05 6254.16,-4665.05 ; 6004.16,-2465.05 8304.16,-2465.05 ; 6254.16,-5065.05 6254.16,-3865.05 6254.16,-2065.05 ; 6754.16,-3065.05 6754.16,-2665.05 ; 6754.16,-2865.05 8304.16,-2865.05 ; 6804.16,-3465.05 6804.16,-3065.05 ; 6804.16,-3265.05 8304.16,-3265.05 ; 6854.16,-2665.05 6854.16,-2465.05 ; 6954.16,-3065.05 6954.16,-2865.05 ; 7254.16,-3065.05 7254.16,-2865.05 ; 7254.16,-2465.05 7254.16,-2265.05 7254.16,-2065.05 ; 7454.16,-3065.05 7454.16,-2865.05 ; 7704.16,-3065.05 7704.16,-2865.05 ; 7904.16,-3065.05 7904.16,-2865.05 ; 3254.16,-5065.05 3254.16,-1865.05 8304.16,-1865.05 8304.16,-5065.05 3254.16,-5065.05
  lines w12: 4494.16,-2265.05 4494.16,-2065.05
  text "MANUFACTURE DETAIL" at 4949.16,-2015.05 h90
  text "Board Thickness(mm)" at 3299.16,-2215.05 h50
  text "According to the layers build-up" at 4749.16,-2215.05 h50
  text "Thickness Tolerance" at 6349.16,-2215.05 h50
  text "Below +10%" at 7449.16,-2215.05 h50
  text "0.8mm" at 4223.85,-2215.53 h50
  text "-" at 7729.16,-2250.05 h50
  text "Board Material" at 3299.16,-2415.05 h50
  text "Conventional FR-4" at 4499.16,-2415.05 h50
  text "Distorted Degree" at 6349.16,-2415.05 h50
  text "Below 0.01mm/mm" at 7349.16,-2415.05 h50
  text "X" at 4558.16,-2601.05 h50
  text "Copper Thickness" at 3299.16,-2615.05 h50
  text "According to the layers build-up" at 4749.16,-2615.05 h50
  text "Silkscreen" at 6349.16,-2615.05 h50
  text "Insulative Ink    Color:White" at 6999.16,-2615.05 h50
  text "Hot Air Levelling" at 4399.16,-2815.05 h60
  text "Soldmask" at 6349.16,-2815.05 h50
  text "Liquid Sensitive Film" at 6999.16,-2815.05 h50
  text "green" at 7473.62,-2999.58 h50
  text "ELECTROLESS NICKEL\IMMERSION GOLD" at 4399.16,-3015.05 h50
  text "Require" at 6349.16,-3015.05 h50
  text "Available Finishes" at 3299.16,-3165.05 h60
  text "IPC-A-600E" at 7280.34,-3194.97 h50
  text "Electrolytic Nickel&Gold" at 4399.16,-3215.05 h60
  text "Inspection" at 6349.16,-3215.05 h50
  text "X" at 4262.04,-3395.37 h50
  text "IPC-6012A" at 7300.16,-3397.05 h50
  text "OSP+ENIG" at 4399.16,-3415.05 h50
  text "Standard" at 6349.16,-3415.05 h50
  text "Drill Note" at 3449.16,-3615.05 h60
  text "Holes Size are after plating" at 4399.16,-3615.05 h50
  text "Packet Require:" at 6349.16,-3615.05 h50
  text "10PCS IN ONE PACKAGE" at 7149.16,-3615.05 h50
  text "BUILD UP OF LAYERS" at 3299.16,-3815.05 h50
  text "According To The Layermark" at 4499.16,-3815.05 h60
  text "Layer Build_up" at 6799.16,-3815.05 h75
  text "Other Notes For The Pcb During Manufacture" at 3499.16,-4015.05 h60
  text "Fill the vias with Black oil" at 3512.16,-4197.05 h50
  text "1" at 3349.16,-4215.05 h50
  text "2" at 3349.16,-4415.05 h50
  text "Mark the manufacturer's logo on the unit" at 3499.16,-4415.05 h50
  text "The osp aera is pad of BGA chip" at 3497.55,-4593.32 h50
  text "3" at 3349.16,-4615.05 h50
  text "4" at 3349.16,-4815.05 h50
  text "5" at 3349.16,-5015.05 h50
Mechanical 6:
  circle w0.5: c-265.31,-335.14 r23.62
  circle w0.5: c175.64,334.15 r23.62
  circle w0.5: c-265.31,-335.14 r23.62
  circle w0.5: c175.63,334.15 r23.62
  circle w0.5: c73.27,-339.07 r53.15
  circle w0.5: c-44.84,338.09 r53.15
  circle w0.5: c-44.84,338.09 r53.15
  circle w0.5: c73.27,-339.08 r53.15
  lines w0.5: -324.37,-374.56 ccw(c-304.68,-374.56) -304.68,-394.25 19.85,-394.26 ccw(c73.27,-339.13) 126.7,-394.26 215,-394.19 ccw(c215,-374.51) 234.69,-374.51 234.69,373.52 ccw(c215,373.52) 215,393.21 8.59,393.22 ccw(c-44.84,338.09) -98.26,393.22 -245.66,393.21 ccw(c-245.66,373.52) -263.2,364.59 -263.3,364.77 cw(c-438.54,275.1) -316.8,120.4 -316.85,120.37 ccw(c-304.67,104.89) -324.36,104.89 -324.37,-374.56